# Altium PCB qav90.PcbDoc (part 3 of 7)
Units mm, origin at the board's own origin, x right, y up, seen from the top; angles counter-clockwise.
Board outline 90 x 90 mm, 3 copper layers (Top Layer, Mid-Layer 1, Bottom Layer); 214 components, 77 nets, 727 pads, 256 vias.
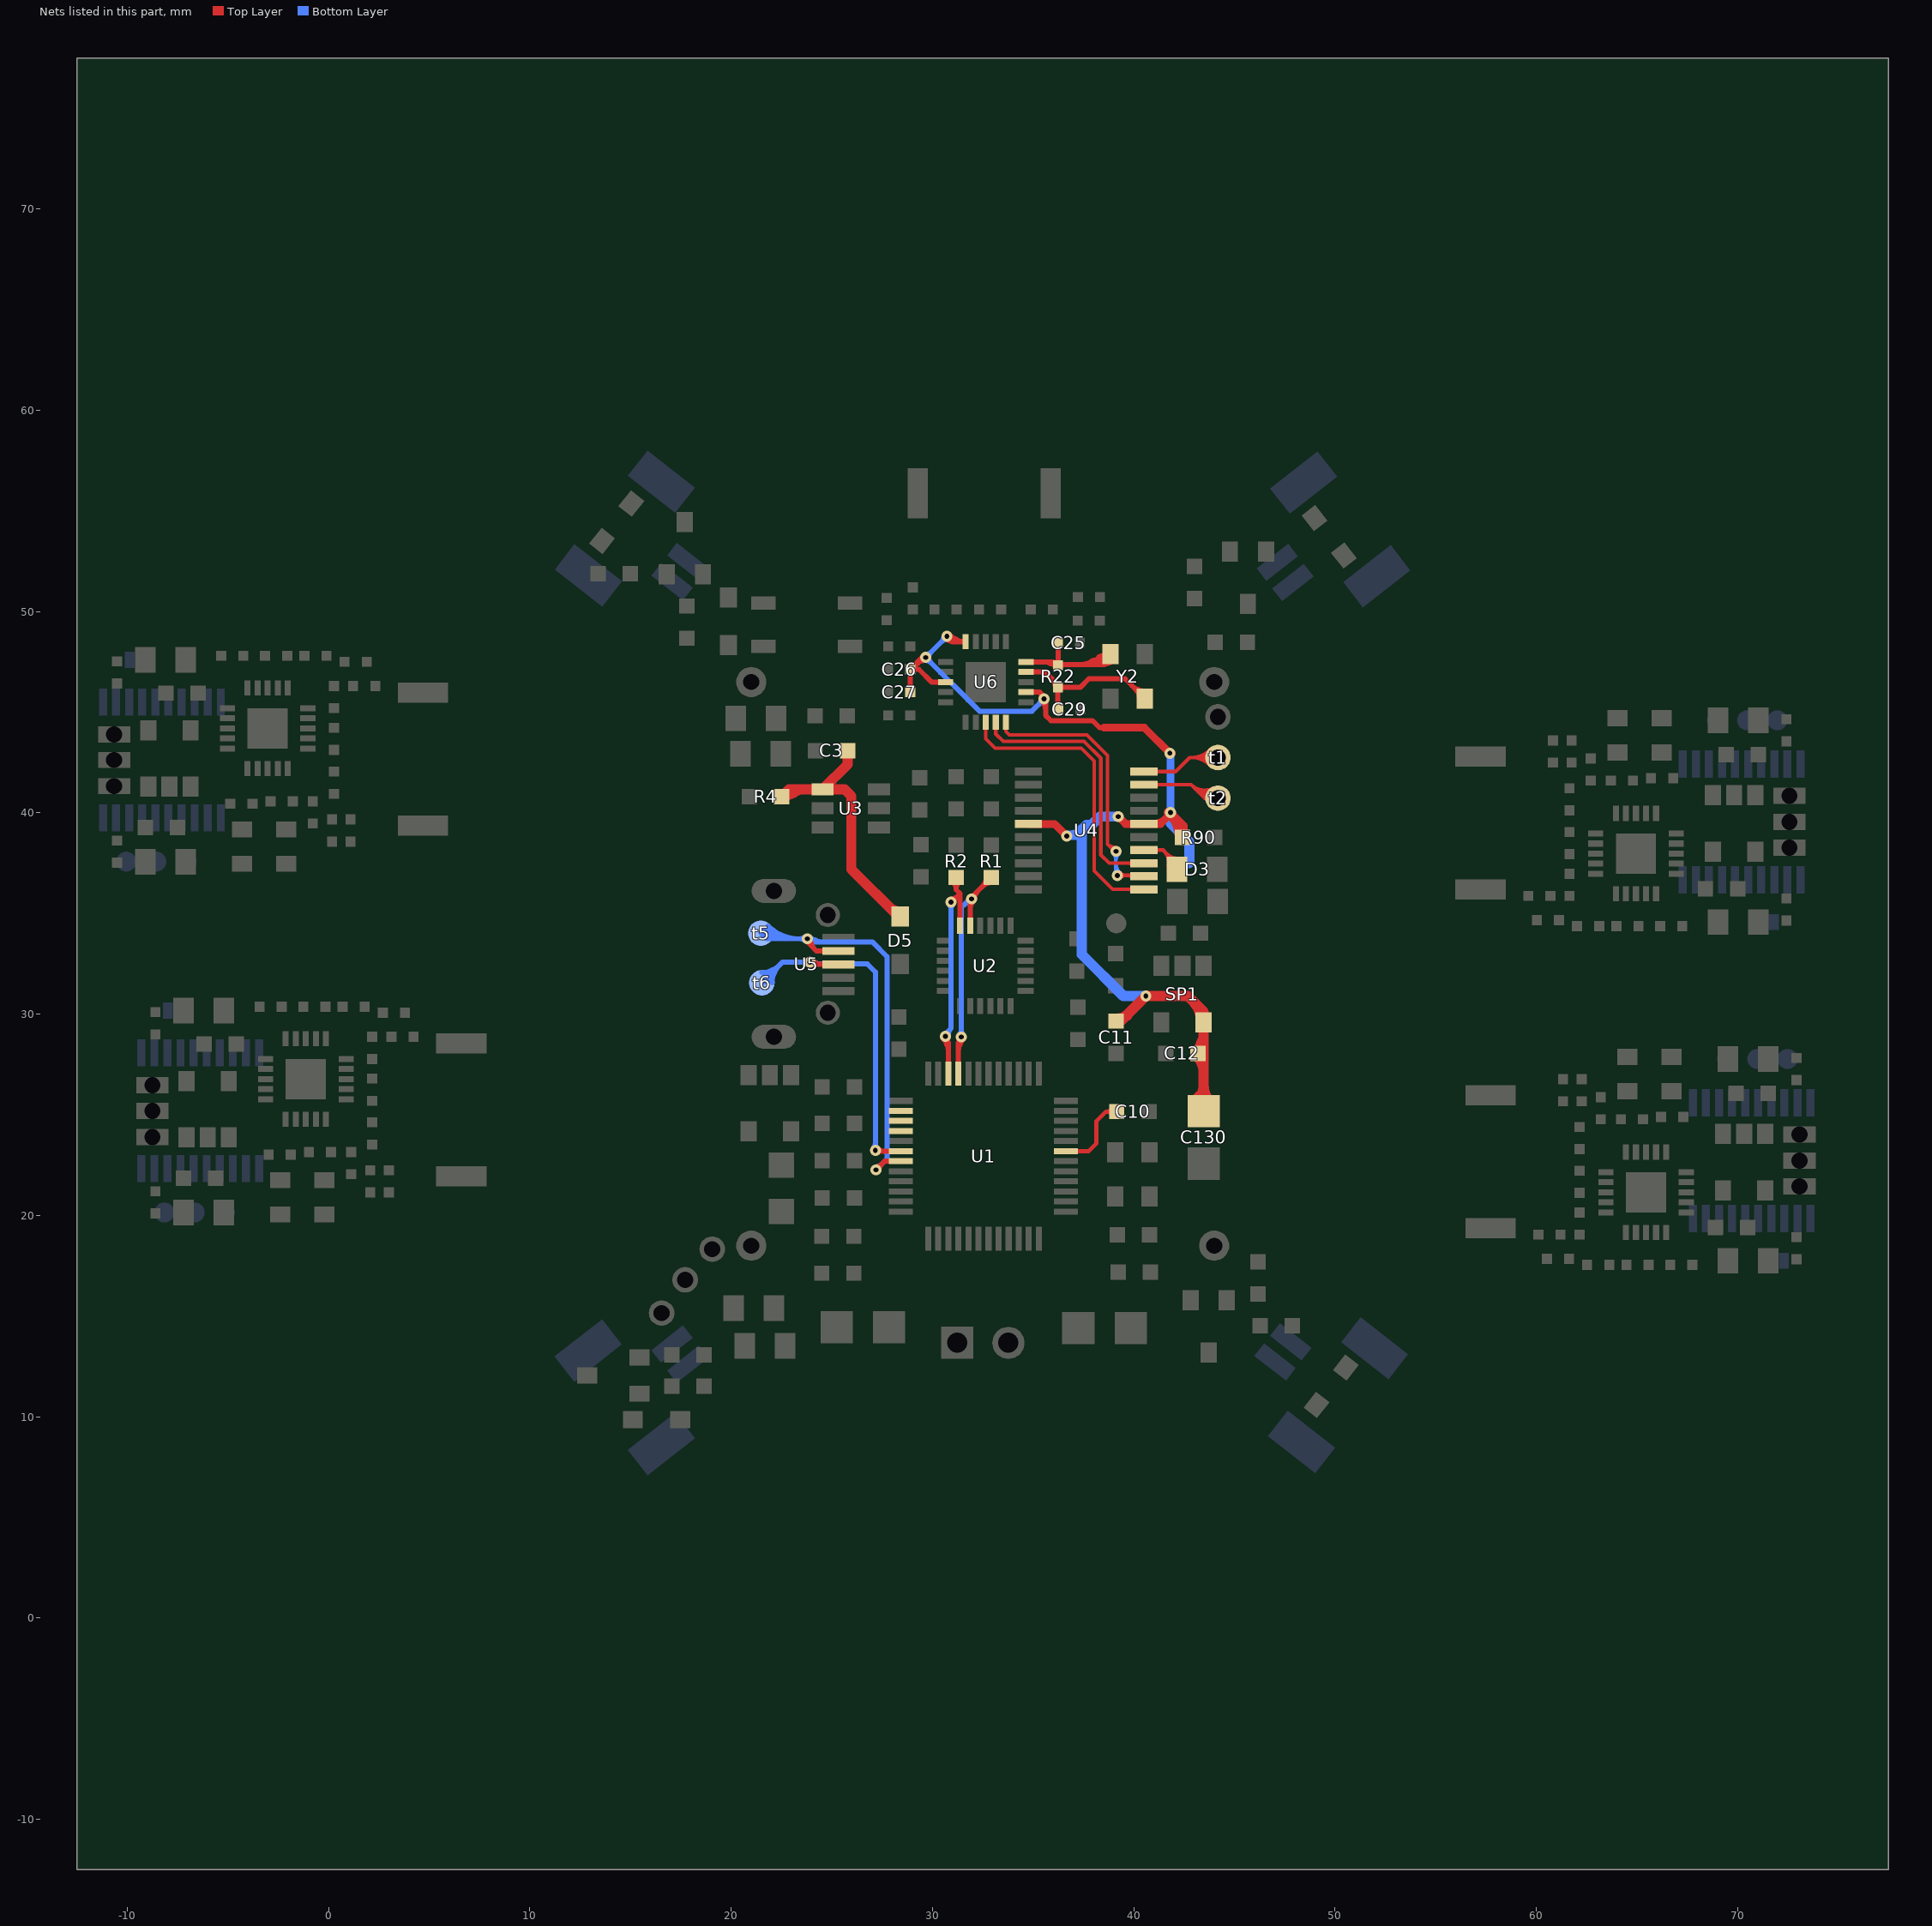
[diagram p3: the nets of this part, all layers, seen from the top]

## Via types
v1: diameter 0.55, hole 0.25, Top Layer to Bottom Layer, tented both sides, 248 vias
v2: diameter 0.55, hole 0.25, Top Layer to Bottom Layer, 8 vias

## Nets (pads, with @x,y where several pads share a name; then routed paths per layer and width w, separated by ;. In a path a pad name is that pad's centre, name@x,y a point inside that pad or via, vN(x,y) a via of type N, cw(c..) or ccw(c..) an arc to the next point about the centre after c; other vN are vias at no path point) (continued)
RFVCC: C11.2 C12.1 C26.2 C27.2 C130.1 R90.1 SP1.5 U4.5 U4.16 U6.7 U6.15 U6.18 | length 91.5
  Top Layer w0.254: C27.2@28.902,46.039 C26.2@28.902,47.111 ; C26.2@28.902,47.132 29.491,47.721 v1(29.668,47.721) ; C26.2@28.925,47.133 29.324,47.133 29.958,46.5 U6.18@30.65,46.5 ; C26.2@29.021,47.1 cw(c29.562,46.955) 29.282,47.44 ; v1(30.723,48.775) 30.998,48.5 U6.15@31.65,48.5 ; v1@30.779,48.638 cw(c30.971,48.178) 31.25,48.591 ; v1@30.862,48.725 ccw(c31.036,48.663) 30.933,48.51 ; U6.7@34.65,46 35.335,46 ; v1@35.613,45.722 35.335,46 ; v1@35.625,45.658 35.625,44.846 35.892,44.579 37.96,44.579 38.303,44.236 38.521,44.236 ; 28.902,46.286 ccw(c29.199,46.286) 28.989,46.076 cw(c29.199,46.286) 28.902,46.286 ; 28.902,46.286 cw(c28.605,46.286) 28.815,46.076 ccw(c28.605,46.286) 28.902,46.286 ; 28.902,46.835 ccw(c28.605,46.835) 28.815,47.045 cw(c28.605,46.835) 28.902,46.835 ; 28.902,46.835 cw(c29.199,46.835) C26.2@28.989,47.045 ; 28.902,46.835 cw(c29.199,46.835) C26.2@28.989,47.045 ; C26.2@28.989,47.045 cw(c29.203,46.831) 29.203,47.133 ccw(c29.203,46.831) C26.2@28.989,47.045 ; C26.2@29.112,47.342 ccw(c29.322,47.132) 29.025,47.132 cw(c29.322,47.132) C26.2@29.112,47.342 ; C26.2@29.112,47.342 cw(c28.902,47.552) 28.902,47.255 ccw(c28.902,47.552) C26.2@29.112,47.342 ; 30.975,48.522 ccw(c30.723,48.27) 30.723,48.627 cw(c30.723,48.27) 30.975,48.522 ; 30.975,48.522 cw(c31.228,48.775) 30.871,48.775 ccw(c31.228,48.775) 30.975,48.522 ; U6.15@31.65,48.5 cw(c31.65,49.58) 30.834,48.872 ccw(c31.65,49.58) U6.15@31.65,48.5 ; 35.335,46 cw(c35.125,45.791) 35.408,45.702 ccw(c35.125,45.791) 35.335,46 ; C26.2@28.989,47.219 ccw(c29.196,47.425) 29.196,47.133 cw(c29.196,47.425) C26.2@28.989,47.219 ; C26.2@29.113,47.343 cw(c29.668,46.787) 29.668,47.573 ccw(c29.668,46.787) C26.2@29.113,47.343 ; v1@30.643,48.705 ccw(c31.093,49.097) 31.093,48.5 cw(c31.093,49.097) v1@30.643,48.705 ; v1@35.445,45.554 cw(c35.008,45.117) 35.625,45.117 ccw(c35.008,45.117) v1@35.445,45.554
  Top Layer w0.381: U4.5@34.762,39.452 36.066,39.452 v1(36.667,38.851) ; 38.521,44.236 40.528,44.236 v1(41.798,42.966) v1@41.899,42.966 ; v1(39.232,39.816) 39.597,39.452 U4.16@40.512,39.452 41.331,39.452 41.823,39.943 v1(41.823,40.02) ; U4.16@40.987,39.461 ccw(c40.987,40.315) 41.591,39.711 cw(c40.987,40.315) U4.16@40.987,39.461 ; 41.625,39.745 ccw(c41.351,40.02) 41.739,40.02 cw(c41.351,40.02) 41.625,39.745
  Top Layer w0.508: C11.2@39.131,29.656 39.359,29.656 v1(40.604,30.901) 42.687,30.901 43.474,30.114 43.474,26.149 ; C11.2@39.241,29.593 cw(c39.869,29.23) 39.681,29.931 ; v1@41.739,40.02 41.781,39.977 v1@41.819,39.939 ; R90.1@42.298,38.776 ccw(c40.662,38.783) v1@41.819,39.939 ; R90.1@42.425,38.775 42.425,39.333 v1@41.819,39.939 ; 42.932,30.656 cw(c41.976,29.7) SP1.5@43.328,29.7 ; C130.1@43.089,25.561 ccw(c42.159,26.491) 43.474,26.491 ; 43.103,30.485 cw(c42.318,29.7) SP1.5@43.428,29.7 ; C12.1@43.105,27.966 cw(c42.213,27.075) 43.474,27.075 ; C130.1@43.189,25.64 ccw(c42.877,26.149) 43.474,26.149 ; C130.1@43.2,25.875 43.474,26.149 ; 43.312,30.132 ccw(c43.799,30.263) SP1.5@43.547,29.826 ; C12.1@43.317,28.089 cw(c44.018,28.277) 43.39,28.64 ; 43.474,26.496 ccw(c44.796,26.496) C130.1@43.861,25.561 ; C130.1@43.759,25.641 cw(c44.069,26.149) 43.474,26.149 ; C11.2@39.131,29.783 ccw(c39.131,30.641) 39.737,30.034 cw(c39.131,30.641) C11.2@39.131,29.783 ; C12.1@43.105,28.146 ccw(c42.213,29.037) 43.474,29.037 cw(c42.213,29.037) C12.1@43.105,28.146
  Bottom Layer w0.254: v1(30.723,48.775) v1(29.668,47.721) 32.34,45.049 34.94,45.049 v1(35.549,45.658) ; v1@29.816,47.721 cw(c30.173,47.721) 29.921,47.973 ; v1@29.816,47.721 ccw(c30.173,47.721) 29.921,47.468 ; v1@29.816,47.721 cw(c30.173,47.721) 29.921,47.973 ; v1@29.816,47.721 ccw(c30.173,47.721) 29.921,47.468 ; 29.921,47.468 ccw(c29.668,47.215) 29.668,47.573 cw(c29.668,47.215) 29.921,47.468 ; 29.921,47.973 cw(c29.668,48.226) 29.668,47.869 ccw(c29.668,48.226) 29.921,47.973 ; 30.47,48.522 ccw(c30.217,48.775) 30.575,48.775 cw(c30.217,48.775) 30.47,48.522 ; 30.47,48.522 cw(c30.723,48.27) 30.723,48.627 ccw(c30.723,48.27) 30.47,48.522 ; 35.297,45.406 ccw(c35.044,45.658) 35.401,45.658 cw(c35.044,45.658) 35.297,45.406 ; 35.297,45.406 cw(c35.549,45.153) 35.549,45.51 ccw(c35.549,45.153) 35.297,45.406
  Bottom Layer w0.381: v1(36.667,38.851) 37.099,38.851 37.429,39.181 ; v1@36.733,38.799 cw(c37.11,38.498) 37.056,38.977 ; v1(41.823,40.02) 41.823,42.89 v1@41.899,42.966 ; 37.429,39.181 cw(c36.81,39.8) 36.679,38.935 ccw(c36.81,39.8) 37.429,39.181
  Bottom Layer w0.508: 37.429,38.978 37.429,32.958 39.486,30.901 v1(40.604,30.901) ; 37.429,39.181 37.657,39.41 37.911,39.41 38.318,39.816 v1(39.232,39.816) ; v1(41.823,40.02) 41.823,39.502 42.775,38.55 42.775,37.525 42.752,37.502 ; v1@41.844,40.02 ccw(c43.144,40.02) 42.225,39.1
RST: C10.1 U1.7 | length 5.4
  Top Layer w0.203: U1.7@36.638,23.196 37.775,23.196 38.14,23.56 38.14,24.678 38.623,25.161 ; C10.1@39.156,25.161 38.623,25.161 ; 38.623,25.161 ccw(c38.623,25.53) 38.926,25.32 cw(c38.623,25.53) 38.623,25.161 ; 38.623,25.161 cw(c38.623,24.791) 38.926,25.001 ccw(c38.623,24.791) 38.623,25.161
RX: t5.1 U1.31 U5.2 | length 34.3
  Top Layer w0.254: v1(23.789,33.746) 23.789,33.586 24.238,33.137 U5.2@25.325,33.137 ; v1@23.937,33.746 ccw(c24.68,33.746) 24.155,33.22 ; v1(27.193,22.265) 27.623,22.696 U1.31@28.438,22.696 ; 27.445,22.518 ccw(c27.698,22.265) 27.341,22.265 cw(c27.698,22.265) 27.445,22.518 ; 27.445,22.518 cw(c27.193,22.77) 27.193,22.413 ccw(c27.193,22.77) 27.445,22.518
  Bottom Layer w0.254: t5.1@21.968,34.157 ccw(c22.344,34.257) 22.149,33.921 ; v1@23.886,33.634 cw(c24.072,33.417) 24.216,33.665 ; v1(27.193,22.265) 27.751,22.824 27.751,32.857 27.015,33.593 23.941,33.593 v1(23.789,33.746) 21.757,33.746 t5.1@21.478,34.025 ; t5.1@21.478,34.025 ccw(c22.152,34.7) 22.152,33.746 cw(c22.152,34.7) t5.1@21.478,34.025 ; 23.432,33.746 ccw(c23.432,34.103) 23.684,33.85 cw(c23.432,34.103) 23.432,33.746 ; 23.432,33.746 cw(c23.432,33.388) 23.684,33.641 ccw(c23.432,33.388) 23.432,33.746 ; 27.445,22.518 ccw(c27.698,22.265) 27.341,22.265 cw(c27.698,22.265) 27.445,22.518 ; 27.445,22.518 cw(c27.193,22.77) 27.193,22.413 ccw(c27.193,22.77) 27.445,22.518 ; t5.1@21.657,34.205 ccw(c22.765,35.313) 22.765,33.746 cw(c22.765,35.313) t5.1@21.657,34.205 ; t5.1@21.837,34.384 ccw(c23.379,35.926) 23.379,33.746 cw(c23.379,35.926) t5.1@21.837,34.384 ; v1@23.894,33.85 ccw(c24.514,34.471) 24.514,33.593 cw(c24.514,34.471) v1@23.894,33.85
SCL: R1.1 U1.21 U2.23 | length 20.3
  Top Layer w0.254: U1.21@31.288,27.046 31.288,28.545 ; v1@31.325,28.77 cw(c31.124,28.588) 31.359,28.452 ; v1@31.434,28.691 31.288,28.545 ; U2.23@31.875,34.4 v1@31.875,35.727 ; v1@31.904,35.765 R1.1@32.933,36.794 ; 31.288,28.545 ccw(c31.154,28.68) 31.312,28.786 cw(c31.154,28.68) 31.288,28.545 ; 32.499,36.36 ccw(c32.066,36.794) 32.679,36.794 cw(c32.066,36.794) 32.499,36.36 ; 32.499,36.36 cw(c32.933,35.927) 32.933,36.54 ccw(c32.933,35.927) 32.499,36.36 ; 31.288,28.159 cw(c32.144,28.159) 31.539,28.764 ccw(c32.144,28.159) 31.288,28.159 ; 31.288,28.514 cw(c31.502,28.514) 31.462,28.724 ccw(c31.502,28.514) 31.288,28.514 ; 31.875,35.207 cw(c32.462,35.207) 32.047,35.622 ccw(c32.462,35.207) 31.875,35.207 ; v1@32.09,35.727 cw(c32.632,35.727) 32.249,36.11 ccw(c32.632,35.727) v1@32.09,35.727
  Bottom Layer w0.254: v1@31.434,28.691 31.434,35.295 31.866,35.727 v1(31.942,35.727) ; 31.434,29.226 ccw(c31.792,29.226) 31.539,28.974 cw(c31.792,29.226) 31.434,29.226 ; 31.434,29.226 cw(c31.077,29.226) 31.33,28.974 ccw(c31.077,29.226) 31.434,29.226 ; 31.56,35.42 cw(c31.942,35.038) 31.942,35.579 ccw(c31.942,35.038) 31.56,35.42
  other v1: 31.434,28.869
SCLK: U1.26
SDA: R2.1 U1.22 U2.24 | length 19.7
  Top Layer w0.254: v1@30.495,28.869 30.788,28.575 ; 30.719,28.485 cw(c30.944,28.614) v1@30.755,28.793 ; U1.22@30.788,27.046 30.788,28.575 ; v1(30.926,35.575) 30.96,35.575 31.375,35.99 ; R2.1@31.18,36.794 31.18,36.184 ; U2.24@31.375,34.4 31.375,35.99 ; 30.788,28.575 cw(c30.918,28.704) 30.768,28.809 ccw(c30.918,28.704) 30.788,28.575 ; 31.18,36.184 ccw(c30.576,36.184) 31.002,36.613 cw(c30.576,36.184) 31.18,36.184 ; 31.18,36.184 cw(c31.785,36.184) 31.359,36.613 ccw(c31.785,36.184) 31.18,36.184 ; 31.18,36.184 31.375,35.99 ; v1@30.542,28.79 cw(c29.948,28.196) 30.788,28.196 ccw(c29.948,28.196) v1@30.542,28.79 ; v1@30.62,28.749 cw(c30.581,28.545) 30.788,28.545 ccw(c30.581,28.545) v1@30.62,28.749 ; v1@30.926,35.723 ccw(c30.926,36.161) 31.236,35.851 cw(c30.926,36.161) v1@30.926,35.723 ; v1@31.074,35.575 cw(c31.351,35.575) 31.155,35.77 ccw(c31.351,35.575) v1@31.074,35.575
  Bottom Layer w0.254: v1@30.495,28.869 30.926,29.301 ; v1(30.926,35.575) 30.926,29.301 ; 30.926,29.301 ccw(c31.255,28.972) 30.794,28.913 cw(c31.255,28.972) 30.926,29.301 ; 30.926,35.217 ccw(c30.569,35.217) 30.822,35.47 cw(c30.569,35.217) 30.926,35.217 ; 30.926,35.217 cw(c31.284,35.217) 31.031,35.47 ccw(c31.284,35.217) 30.926,35.217
  other v1: 30.647,28.894
SDI: U1.28
SDO: U1.27
SPI_MISO: U4.12 U6.5 | length 20.2
  Top Layer w0.178: U6.5@33.65,44.5 33.65,44.052 33.822,43.88 37.671,43.88 38.699,42.853 38.699,38.445 ; 38.819,38.348 cw(c38.719,37.925) v1@39.123,38.086 ; v1(39.131,38.089) 39.054,38.089 38.699,38.445 ; v1(39.181,36.895) 40.468,36.895 U4.12@40.512,36.852 ; 38.699,38.445 ccw(c39.109,38.855) 39.125,38.275 cw(c39.109,38.855) 38.699,38.445 ; 39.631,36.895 ccw(c39.631,36.446) 39.313,36.764 cw(c39.631,36.446) 39.631,36.895 ; 39.631,36.895 cw(c39.631,37.345) 39.313,37.027 ccw(c39.631,37.345) 39.631,36.895 ; 38.867,38.277 cw(c38.679,38.089) 38.945,38.089 ccw(c38.679,38.089) 38.867,38.277 ; 39.663,36.895 cw(c39.663,36.478) 39.958,36.773 ccw(c39.663,36.478) 39.663,36.895
  Bottom Layer w0.178: v1@39.105,38.115 39.105,36.972 v1(39.181,36.895) ; v1@38.999,37.958 cw(c38.743,37.701) 39.105,37.701 ccw(c38.743,37.701) v1@38.999,37.958 ; v1@39.05,37.027 ccw(c38.916,37.161) 39.105,37.161 cw(c38.916,37.161) v1@39.05,37.027 ; 39.105,37.529 ccw(c39.815,37.529) 39.313,37.027 cw(c39.815,37.529) 39.105,37.529 ; 39.105,37.579 cw(c39.641,37.579) 39.262,37.958 ccw(c39.641,37.579) 39.105,37.579
SPI_MOSI: U4.13 U6.4 | length 14.3
  Top Layer w0.178: U6.4@33.15,44.5 33.15,43.917 33.517,43.55 37.534,43.55 38.369,42.716 38.369,37.911 38.778,37.502 U4.13@40.512,37.502 ; 39.769,37.502 ccw(c39.769,37.77) 39.958,37.58 cw(c39.769,37.77) 39.769,37.502 ; 39.769,37.502 cw(c39.769,37.233) 39.958,37.423 ccw(c39.769,37.233) 39.769,37.502
SPI_SCK: U4.11 U6.3 | length 15.8
  Top Layer w0.178: U6.3@32.65,44.5 32.65,43.681 33.111,43.22 37.398,43.22 38.038,42.579 38.038,37.124 38.961,36.202 U4.11@40.512,36.202 ; 39.769,36.202 ccw(c39.769,36.47) 39.958,36.28 cw(c39.769,36.47) 39.769,36.202 ; 39.769,36.202 cw(c39.769,35.933) 39.958,36.123 ccw(c39.769,35.933) 39.769,36.202
STM8-LED: D3.2 U4.14 | length 4.6
  Top Layer w0.178: U4.14@40.512,38.152 41.473,38.152 ; U4.14@41.065,38.073 cw(c41.255,37.883) 41.255,38.152 cw(c41.255,38.42) U4.14@41.065,38.23 ; 41.687,37.938 ccw(c42.15,38.401) D3.2@42.15,37.746 ; 41.728,37.897 cw(c41.274,37.443) D3.2@41.911,37.359 ; D3.2@41.735,37.382 ccw(c40.824,37.502) 41.473,38.152 ; D3.2@42.15,37.2 42.15,37.475 41.473,38.152
SWCK: t1.1 U4.20 | length 10.7
  Top Layer w0.178: U4.20@40.512,42.052 42.077,42.052 42.776,42.75 t1.1@44.185,42.75 ; t1.1@43.799,42.364 ccw(c42.867,41.432) 42.867,42.75 ccw(c42.867,44.068) t1.1@43.799,43.136 ; t1.1@43.895,42.459 ccw(c43.193,41.758) 43.193,42.75 ccw(c43.193,43.743) t1.1@43.895,43.041 ; t1.1@43.925,42.49 ccw(c43.296,41.861) 43.296,42.75 ccw(c43.296,43.639) t1.1@43.925,43.011 ; t1.1@44.02,42.585 ccw(c43.622,42.187) 43.622,42.75 ccw(c43.622,43.313) t1.1@44.02,42.915 ; 41.255,42.052 ccw(c41.255,41.783) 41.065,41.973 cw(c41.255,41.783) 41.255,42.052 ; 41.255,42.052 cw(c41.255,42.32) 41.065,42.13 ccw(c41.255,42.32) 41.255,42.052
SWIO: t2.1 U4.19 | length 10
  Top Layer w0.178: U4.19@40.512,41.402 42.854,41.402 ; 43.03,41.226 ccw(c43.641,41.837) t2.1@44.023,41.061 ; 43.205,41.05 ccw(c43.757,41.602) t2.1@44.101,40.902 ; 43.381,40.875 ccw(c43.873,41.366) t2.1@44.18,40.742 ; t2.1@43.649,40.628 ccw(c43.525,40.605) 43.525,40.731 ; t2.1@43.649,40.833 cw(c43.525,40.857) 43.525,40.731 ; t2.1@43.816,40.549 ccw(c43.525,40.406) 43.525,40.731 ; t2.1@43.816,40.912 cw(c43.525,41.056) 43.525,40.731 ; t2.1@43.944,41.221 cw(c43.525,42.073) 42.854,41.402 ; t2.1@44.185,40.731 43.525,40.731 ; 41.255,41.402 ccw(c41.255,41.133) 41.065,41.323 cw(c41.255,41.133) 41.255,41.402 ; 41.255,41.402 cw(c41.255,41.67) 41.065,41.48 ccw(c41.255,41.67) 41.255,41.402 ; 42.854,41.402 43.525,40.731
TX: t6.1 U1.30 U5.3 | length 27.5
  Top Layer w0.254: v1(23.916,32.577) 24.018,32.475 U5.3@25.325,32.475 ; v1@24.021,32.682 ccw(c24.521,33.182) 24.521,32.475 ; v1(27.167,23.23) 27.202,23.196 U1.30@28.438,23.196 ; v1@27.272,23.126 cw(c27.441,22.956) 27.441,23.196 ccw(c27.441,22.956) v1@27.272,23.126 ; v1@27.272,23.335 ccw(c27.608,23.671) 27.608,23.196 cw(c27.608,23.671) v1@27.272,23.335
  Bottom Layer w0.254: 22.168,32.241 ccw(c22.398,31.383) t6.1@21.528,31.561 ; 22.208,32.201 cw(c21.35,32.431) t6.1@21.528,31.561 ; v1@23.811,32.473 ccw(c23.559,32.22) 23.559,32.577 ccw(c23.559,32.935) v1@23.811,32.682 ; v1@24.021,32.682 ccw(c24.46,33.122) 24.46,32.5 ; v1(27.167,23.23) 27.167,32.095 26.762,32.5 23.993,32.5 v1(23.916,32.577) 22.544,32.577 t6.1@21.528,31.561 ; 22.396,32.429 ccw(c23.263,31.561) 22.036,31.561 cw(c23.263,31.561) 22.396,32.429 ; 22.396,32.429 cw(c21.528,33.296) 21.528,32.069 ccw(c21.528,33.296) 22.396,32.429 ; 27.167,23.587 ccw(c27.525,23.587) 27.272,23.335 cw(c27.525,23.587) 27.167,23.587 ; 27.167,23.587 cw(c26.81,23.587) 27.063,23.335 ccw(c26.81,23.587) 27.167,23.587
VBUS: C3.2 D5.2 R4.2 U3.4 | length 18.5
  Top Layer w0.508: R4.2@22.519,40.807 22.885,41.173 U3.4@24.548,41.173 ; R4.2@22.552,40.93 ccw(c22.739,41.63) 23.102,41.002 ; C3.2@25.795,43.093 25.795,42.42 U3.4@24.548,41.173 ; 27.845,35.33 ccw(c28.411,35.897) D5.2@28.411,35.096 ; 27.862,35.313 ccw(c28.386,35.837) D5.2@28.386,35.096 ; D5.2@28.386,34.85 28.325,34.85 25.973,37.202 25.973,40.832 25.633,41.173 U3.4@24.548,41.173 ; R4.2@22.609,40.717 cw(c23.708,39.617) 23.708,41.173 ccw(c23.708,39.617) R4.2@22.609,40.717 ; U3.4@24.844,41.173 cw(c25.559,41.173) 25.053,41.678 ccw(c25.559,41.173) U3.4@24.844,41.173
XC1: C25.2 R22.1 U6.10 Y2.3 | length 21.9
  Top Layer w0.254: U6.10@34.65,47.5 35.943,47.5 ; 35.821,47.436 ccw(c35.993,47.734) R22.1@36.171,47.44 ; C25.2@36.25,48.275 R22.1@36.25,47.193 ; 37.889,47.518 cw(c38.324,46.784) Y2.3@38.723,47.539 ; 38.232,47.445 cw(c38.593,46.82) Y2.3@38.779,47.517 ; 38.28,47.75 cw(c38.573,47.255) Y2.3@38.841,47.764 ; 38.308,47.489 ccw(c38.01,48.006) Y2.3@38.586,47.851 ; Y2.3@38.85,47.881 38.33,47.36 ; 35.943,47.5 ccw(c36.105,47.662) 36.19,47.449 cw(c36.105,47.662) 35.943,47.5 ; 35.943,47.5 cw(c35.943,47.331) 36.112,47.333 ccw(c35.943,47.331) 35.943,47.5 ; 35.943,47.5 R22.1@36.25,47.193 ; R22.1@36.25,47.193 36.25,47.36 38.33,47.36 ; 38.33,47.36 cw(c38.713,46.977) 38.804,47.511 ccw(c38.713,46.977) 38.33,47.36 ; 35.539,47.5 cw(c35.539,46.639) 36.148,47.248 ccw(c35.539,46.639) 35.539,47.5 ; C25.2@36.14,48.365 cw(c35.875,48.1) 36.25,48.1 ccw(c35.875,48.1) C25.2@36.14,48.365 ; R22.1@36.148,47.422 ccw(c35.902,47.668) 36.25,47.668 cw(c35.902,47.668) R22.1@36.148,47.422 ; 36.25,47.596 ccw(c36.496,47.596) 36.322,47.422 cw(c36.496,47.596) 36.25,47.596 ; R22.1@36.322,47.248 cw(c36.593,46.977) 36.593,47.36 ccw(c36.593,46.977) R22.1@36.322,47.248 ; 37.176,47.36 ccw(c37.176,49.455) 38.657,47.974 cw(c37.176,49.455) 37.176,47.36 ; 37.789,47.36 ccw(c37.789,48.841) 38.837,47.794 cw(c37.789,48.841) 37.789,47.36 ; 38.402,47.36 ccw(c38.402,48.228) 39.016,47.614 cw(c38.402,48.228) 38.402,47.36 ; Y2.3@38.455,47.485 ccw(c38.159,47.781) 38.577,47.781 cw(c38.159,47.781) Y2.3@38.455,47.485
XC2: C29.2 R22.2 U6.9 Y2.1 | length 14.6
  Top Layer w0.254: U6.9@34.65,47 35.605,47 R22.2@36.37,46.235 ; R22.2@36.235,46.09 36.235,45.168 C29.2@36.253,45.15 ; R22.2@36.235,46.235 R22.2@36.37,46.235 ; 40.113,46.171 cw(c39.956,45.585) Y2.1@40.532,45.775 ; Y2.1@40.372,45.503 Y2.1@40.55,45.325 ; Y2.1@40.55,45.681 39.569,46.662 37.772,46.662 37.345,46.235 R22.2@36.37,46.235 ; 36.235,45.938 ccw(c35.938,45.938) 36.148,46.148 cw(c35.938,45.938) 36.235,45.938 ; 36.235,45.938 cw(c36.532,45.938) R22.2@36.322,46.148 ; 36.235,45.938 cw(c36.532,45.938) R22.2@36.322,46.148 ; R22.2@36.322,46.148 cw(c36.532,45.938) 36.532,46.235 ; R22.2@36.322,46.148 cw(c36.532,45.938) 36.532,46.235 ; 36.532,46.235 cw(c36.532,46.532) 36.322,46.322 ccw(c36.532,46.532) 36.532,46.235 ; 35.93,46.675 cw(c35.49,46.235) 36.112,46.235 ccw(c35.49,46.235) 35.93,46.675 ; C29.2@36.166,45.237 ccw(c35.998,45.405) 36.235,45.405 cw(c35.998,45.405) C29.2@36.166,45.237 ; 36.235,45.49 ccw(c36.592,45.49) 36.34,45.237 cw(c36.592,45.49) 36.235,45.49 ; 39.913,46.317 ccw(c40.55,46.954) 40.55,46.054 cw(c40.55,46.954) 39.913,46.317 ; Y2.1@40.155,46.076 cw(c39.859,45.781) 40.277,45.781 ccw(c39.859,45.781) Y2.1@40.155,46.076
pads on no net: B1.0 B2.0 C1_1.1 C1_1.2 C1_1_1.1 C1_1_1.2 C1_2.1 C1_2.2 C1_2_1.1 C1_2_1.2 C4.1 C4.2 C4_1.1 C4_1.2 C4_1_1.1 C4_1_1.2 C4_2.1 C4_2.2 C8_1.1 C8_1.2 C8_1_1.1 C8_1_1.2 C8_2.1 C8_2.2 C8_2_1.1 C8_2_1.2 C9_1.1 C9_1.2 C9_1_1.1 C9_1_1.2 C9_2.1 C9_2.2 C9_2_1.1 C9_2_1.2 C11_1.1 C11_1.2 C11_1_1.1 C11_1_1.2 C11_2.1 C11_2.2 C11_2_1.1 C11_2_1.2 C12_1.1 C12_1.2 C12_1_1.1 C12_1_1.2 C12_2.1 C12_2.2 C12_2_1.1 C12_2_1.2 C13.1 C13.2 C13_1.1 C13_1.2 C13_1_1.1 C13_1_1.2 C13_2.1 C13_2.2 C14.1 C14.2 C14_1.1 C14_1.2 C14_1_1.1 C14_1_1.2 C14_2.1 C14_2.2 C16_1.1 C16_1.2 C16_1_1.1 C16_1_1.2 C16_2.1 C16_2.2 C16_2_1.1 C16_2_1.2 C17.1 C17.2 C17_1.1 C17_1.2 C17_1_1.1 C17_1_1.2 C17_2.1 C17_2.2 D1_1.1 D1_1.2 D1_1_1.1 D1_1_1.2 D1_2.1 D1_2.2 D1_2_1.1 D1_2_1.2 D2_1.1 D2_1.2 D2_1_1.1 D2_1_1.2 D2_2.1 D2_2.2 D2_2_1.1 D2_2_1.2 E1.2 E1_1.1 E1_1.2 E1_1_1.1 E1_1_1.2 E1_2.1 E1_2.2 E1_2_1.1 E1_2_1.2 L1_1.1 L1_1.2 L1_1_1.1 L1_1_1.2 L1_2.1 L1_2.2 L1_2_1.1 L1_2_1.2 L2_1.1 L2_1.2 L2_1_1.1 L2_1_1.2 L2_2.1 L2_2.2 L2_2_1.1 L2_2_1.2 L3_1.1 L3_1.2 L3_1_1.1 L3_1_1.2 L3_2.1 L3_2.2 L3_2_1.1 L3_2_1.2 P1_1.1 P1_1.2 P1_1.3 P1_1_1.1 P1_1_1.2 P1_1_1.3 P1_2.1 P1_2.2 P1_2.3 P1_2_1.1 P1_2_1.2 P1_2_1.3 R1_1.1 R1_1.2 R1_1_1.1 R1_1_1.2 R1_2.1 R1_2.2 R1_2_1.1 R1_2_1.2 R2_1.1 R2_1.2 R2_1_1.1 R2_1_1.2 R2_2.1 R2_2.2 R2_2_1.1 R2_2_1.2 R3_1.1 R3_1.2 R3_1_1.1 R3_1_1.2 R3_2.1 R3_2.2 R3_2_1.1 R3_2_1.2 R5_1.1 R5_1.2 R5_1_1.1 R5_1_1.2 R5_2.1 R5_2.2 R5_2_1.1 R5_2_1.2 SP1.4 SP1_1.1 SP1_1.2 SP1_1.3 SP1_1.4 SP1_1.5 SP1_1_1.1 SP1_1_1.2 SP1_1_1.3 SP1_1_1.4 SP1_1_1.5 SP1_2.1 SP1_2.2 SP1_2.3 SP1_2.4 SP1_2.5 SP1_2_1.1 SP1_2_1.2 SP1_2_1.3 SP1_2_1.4 SP1_2_1.5 SP2.4 t4_1.1 t4_1_1.1 t4_2.1 t4_2_1.1 t5_1.1 t5_1_1.1 t5_2.1 t5_2_1.1 t6_1.1 t6_1_1.1 t6_2.1 t6_2_1.1 t7.1 t7_1.1 t7_1_1.1 t7_2.1 t8.1 t8_1.1 t8_1_1.1 t8_2.1 U1.10 U1.11 U1.12 U1.33 U1.38 U1.41 U1.45 U1.46 U1_1.0 U1_1.1 U1_1.2 U1_1.3 U1_1.4 U1_1.5 U1_1.6 U1_1.7 U1_1.8 U1_1.9 U1_1.10 U1_1.11 U1_1.12 U1_1.13 U1_1.14 U1_1.15 U1_1.16 U1_1.17 U1_1.18 U1_1.19 U1_1.20 U1_1_1.0 U1_1_1.1 U1_1_1.2 U1_1_1.3 U1_1_1.4 U1_1_1.5 U1_1_1.6 U1_1_1.7 U1_1_1.8 U1_1_1.9 U1_1_1.10 U1_1_1.11 U1_1_1.12 U1_1_1.13 U1_1_1.14 U1_1_1.15 U1_1_1.16 U1_1_1.17 U1_1_1.18 U1_1_1.19 U1_1_1.20 U1_2.0 U1_2.1 U1_2.2 U1_2.3 U1_2.4 U1_2.5 U1_2.6 U1_2.7 U1_2.8 U1_2.9 U1_2.10 U1_2.11 U1_2.12 U1_2.13 U1_2.14 U1_2.15 U1_2.16 U1_2.17 U1_2.18 U1_2.19 U1_2.20 U1_2_1.0 U1_2_1.1 U1_2_1.2 U1_2_1.3 U1_2_1.4 U1_2_1.5 U1_2_1.6 U1_2_1.7 U1_2_1.8 U1_2_1.9 U1_2_1.10 U1_2_1.11 U1_2_1.12 U1_2_1.13 U1_2_1.14 U1_2_1.15 U1_2_1.16 U1_2_1.17 U1_2_1.18 U1_2_1.19 U1_2_1.20 U2.2 U2.3 U2.4 U2.5 U2.6 U2.7 U2.14 U2.15 U2.16 U2.17 U2.19 U2.21 U2.22 U2_1.1 U2_1.2 U2_1.3 U2_1.4 U2_1.5 U2_1.6 U2_1.7 U2_1.8 U2_1.9 U2_1.10 U2_1.11 U2_1.12 U2_1.13 U2_1.14 U2_1.15 U2_1.16 U2_1.17 U2_1.18 U2_1.19 U2_1.20 U2_1_1.1 U2_1_1.2 U2_1_1.3 U2_1_1.4 U2_1_1.5 U2_1_1.6 U2_1_1.7 U2_1_1.8 U2_1_1.9 U2_1_1.10 U2_1_1.11 U2_1_1.12 U2_1_1.13 U2_1_1.14 U2_1_1.15 U2_1_1.16 U2_1_1.17 U2_1_1.18 U2_1_1.19 U2_1_1.20 U2_2.1 U2_2.2 U2_2.3 U2_2.4 U2_2.5 U2_2.6 U2_2.7 U2_2.8 U2_2.9 U2_2.10 U2_2.11 U2_2.12 U2_2.13 U2_2.14 U2_2.15 U2_2.16 U2_2.17 U2_2.18 U2_2.19 U2_2.20 U2_2_1.1 U2_2_1.2 U2_2_1.3 U2_2_1.4 U2_2_1.5 U2_2_1.6 U2_2_1.7 U2_2_1.8 U2_2_1.9 U2_2_1.10 U2_2_1.11 U2_2_1.12 U2_2_1.13 U2_2_1.14 U2_2_1.15 U2_2_1.16 U2_2_1.17 U2_2_1.18 U2_2_1.19 U2_2_1.20 U4.8 U5.0@24.805,30.075 U5.0@24.805,34.925 U5.4 Y1.2 Y1.4 Y1_1.1 Y1_1.2 Y1_1.3 Y1_1.4 Y1_1_1.1 Y1_1_1.2 Y1_1_1.3 Y1_1_1.4 Y1_2.1 Y1_2.2 Y1_2.3 Y1_2.4 Y1_2_1.1 Y1_2_1.2 Y1_2_1.3 Y1_2_1.4 Y2.2 Y2.4
copper on no net: | length 1912.2